# EAGLE board mindbrain_schematic_v1 (EAGLE 7.2.0)

Size 100 x 80 mm. Coordinates in mm from the lower left corner, seen from the top.
Outline: 0,0 100,0 100,80 0,80 0,0
Copper layers (1*16): Top 0.035mm / dielectric 1.5mm / Bottom 0.035mm
Design rules "default": minimum track width 10mil, minimum drill 24mil, track to track 8mil, track to pad 8mil, pad to pad 8mil, via to via 8mil, smd to smd 8mil, copper to edge 40mil, drill to drill 8mil, minimum pad ring 10mil, minimum via ring 8mil, stop-mask expansion 4mil, vias tented up to drill 0mil, thermal gap 10mil

## Footprints (pad centres in the part's own frame; a part is rotated, then mirrored left to right if it is on the bottom)
CAP-PTH-SMALL-KIT = drill 1.016 pad 2.032: 1 -1.397,0; 2 1.397,0
2X5-SHROUDED = drill 1.016 pad 1.88 octagon: 1 -1.27,5.08; 2 1.27,5.08; 3 -1.27,2.54; 4 1.27,2.54; 5 -1.27,0; 6 1.27,0; 7 -1.27,-2.54; 8 1.27,-2.54; 9 -1.27,-5.08; 10 1.27,-5.08
DIL14 = drill 0.813 long: 1 -7.62,-3.81; 2 -5.08,-3.81; 3 -2.54,-3.81; 4 0,-3.81; 5 2.54,-3.81; 6 5.08,-3.81; 7 7.62,-3.81; 8 7.62,3.81; 9 5.08,3.81; 10 2.54,3.81; 11 0,3.81; 12 -2.54,3.81; 13 -5.08,3.81; 14 -7.62,3.81
1X01NS-KIT = drill 1.016 pad 1.88: 1 0,0
AXIAL-0.4 = drill 0.9 pad 1.88: P$1 -5.08,0; P$2 5.08,0

## Placement (x,y rotation side)
C1  [CAP-PTH-SMALL-KIT]  13.97,59.69 90 top
C2  [CAP-PTH-SMALL-KIT]  17.78,8.89 90 top
C3  [CAP-PTH-SMALL-KIT]  17.78,3.81 90 top
C4  [CAP-PTH-SMALL-KIT]  21.59,59.69 90 top
CON1  POWER  [2X5-SHROUDED]  6.35,12.7 0 top
IC1  TL084P  [DIL14]  62.23,30.48 0 top
IC2  TL084P  [DIL14]  41.91,30.48 0 top
INPUT1  [1X01NS-KIT]  -52.07,49.53 0 top  (outside the outline)
INPUT2  [1X01NS-KIT]  -54.61,49.53 0 top  (outside the outline)
INPUT3  [1X01NS-KIT]  -57.15,49.53 0 top  (outside the outline)
INPUT4  [1X01NS-KIT]  -13.97,54.61 0 top  (outside the outline)
INPUT5  [1X01NS-KIT]  -16.51,54.61 0 top  (outside the outline)
INPUT6  [1X01NS-KIT]  -19.05,54.61 0 top  (outside the outline)
INPUT7  [1X01NS-KIT]  -21.59,54.61 0 top  (outside the outline)
INPUT8  [1X01NS-KIT]  -24.13,54.61 0 top  (outside the outline)
OUTPUT1  [1X01NS-KIT]  -26.67,54.61 0 top  (outside the outline)
OUTPUT2  [1X01NS-KIT]  -29.21,54.61 0 top  (outside the outline)
OUTPUT3  [1X01NS-KIT]  -31.75,54.61 0 top  (outside the outline)
OUTPUT4  [1X01NS-KIT]  -34.29,54.61 0 top  (outside the outline)
OUTPUT5  [1X01NS-KIT]  -36.83,54.61 0 top  (outside the outline)
OUTPUT6  [1X01NS-KIT]  -39.37,54.61 0 top  (outside the outline)
OUTPUT7  [1X01NS-KIT]  -41.91,54.61 0 top  (outside the outline)
OUTPUT8  [1X01NS-KIT]  -44.45,54.61 0 top  (outside the outline)
R1  1KΩ  [AXIAL-0.4]  67.31,17.78 90 top
R2  1KΩ  [AXIAL-0.4]  57.15,17.78 90 top
R3  1KΩ  [AXIAL-0.4]  25.4,2.54 0 top
R4  1KΩ  [AXIAL-0.4]  57.15,43.18 270 top
R5  1KΩ  [AXIAL-0.4]  33.02,5.08 0 top
R6  1KΩ  [AXIAL-0.4]  21.59,13.97 0 top
R7  1KΩ  [AXIAL-0.4]  46.99,43.18 270 top
R8  1KΩ  [AXIAL-0.4]  27.94,40.64 0 top
RF  2KΩ  [AXIAL-0.4]  21.59,19.05 0 top
RF1  2KΩ  [AXIAL-0.4]  69.85,17.78 90 top
RF2  2KΩ  [AXIAL-0.4]  19.05,25.4 0 top
RF3  2KΩ  [AXIAL-0.4]  7.62,30.48 0 top
RF4  2KΩ  [AXIAL-0.4]  35.56,13.97 0 top
RF5  2KΩ  [AXIAL-0.4]  26.67,35.56 0 top
RF6  2KΩ  [AXIAL-0.4]  12.7,35.56 0 top
RF7  2KΩ  [AXIAL-0.4]  38.1,58.42 0 top
RIN  10KΩ  [AXIAL-0.4]  25.4,49.53 0 top
RIN1  10KΩ  [AXIAL-0.4]  11.43,41.91 0 top
RIN2  10KΩ  [AXIAL-0.4]  50.8,3.81 0 top
RIN3  10KΩ  [AXIAL-0.4]  59.69,43.18 270 top
RIN4  10KΩ  [AXIAL-0.4]  12.7,53.34 0 top
RIN5  10KΩ  [AXIAL-0.4]  44.45,17.78 90 top
RIN6  10KΩ  [AXIAL-0.4]  52.07,57.15 0 top
RIN7  10KΩ  [AXIAL-0.4]  34.29,48.26 270 top

## Library data of the parts
C1-C4 = SparkFun-Capacitors
CON1 INPUT1-INPUT8 OUTPUT1-OUTPUT8 = SparkFun-Connectors
IC1 IC2 = linear
R1-R8 RF RF1-RF7 RIN RIN1-RIN7 = SparkFun-Passives

## Nets
GND: R1.P$1 R2.P$1 R3.P$1 R4.P$1 R5.P$1 R6.P$1 R7.P$1 R8.P$1 RIN1.P$1 RIN2.P$1 RIN3.P$1 RIN4.P$1 RIN5.P$1 RIN6.P$1 RIN7.P$1 RIN.P$1
N$1: IC1.3 INPUT1.1 RIN.P$2
N$2: IC1.1 OUTPUT1.1 RF.P$2
N$3: IC1.2 R2.P$2 RF.P$1
N$4: IC1.5 INPUT2.1 RIN1.P$2
N$5: IC1.7 OUTPUT2.1 RF1.P$2
N$6: IC1.6 R1.P$2 RF1.P$1
N$7: IC1.10 INPUT3.1 RIN2.P$2
N$8: IC1.8 OUTPUT3.1 RF2.P$2
N$9: IC1.9 R3.P$2 RF2.P$1
N$10: IC1.12 INPUT4.1 RIN3.P$2
N$11: IC1.14 OUTPUT4.1 RF3.P$2
N$12: IC1.13 R4.P$2 RF3.P$1
N$13: IC2.3 INPUT5.1 RIN4.P$2
N$14: IC2.1 OUTPUT5.1 RF4.P$2
N$15: IC2.2 R5.P$2 RF4.P$1
N$16: IC2.5 INPUT6.1 RIN5.P$2
N$17: IC2.7 OUTPUT6.1 RF5.P$2
N$18: IC2.6 R6.P$2 RF5.P$1
N$19: IC2.10 INPUT7.1 RIN6.P$2
N$20: IC2.8 OUTPUT7.1 RF6.P$2
N$21: IC2.9 R7.P$2 RF6.P$1
N$22: IC2.12 INPUT8.1 RIN7.P$2
N$23: IC2.14 OUTPUT8.1 RF7.P$2
N$24: IC2.13 R8.P$2 RF7.P$1
N$25: CON1.3 CON1.4 CON1.5 CON1.6 CON1.7 CON1.8
N$27: CON1.1 CON1.2
N$28: CON1.9 CON1.10
V+: IC1.4 IC2.4
V-: IC1.11 IC2.11

## Tracks (layer width: path | path; a pad name or v marks a point on that pad's centre or on a via)
GND  (15 unrouted)
N$1  (2 unrouted)
N$2  (2 unrouted)
N$3  (2 unrouted)
N$4  (2 unrouted)
N$5  (2 unrouted)
N$6  (2 unrouted)
N$7  (2 unrouted)
N$8  (2 unrouted)
N$9  (2 unrouted)
N$10  (2 unrouted)
N$11  (2 unrouted)
N$12  (2 unrouted)
N$13  (2 unrouted)
N$14  (2 unrouted)
N$15  (2 unrouted)
N$16  (2 unrouted)
N$17  (2 unrouted)
N$18  (2 unrouted)
N$19  (2 unrouted)
N$20  (2 unrouted)
N$21  (2 unrouted)
N$22  (2 unrouted)
N$23  (2 unrouted)
N$24  (2 unrouted)
N$25  (5 unrouted)
N$27  (1 unrouted)
N$28  (1 unrouted)
V+  (1 unrouted)
V-  (1 unrouted)